# Altium PCB PCB_Luciferin_Module_V2.0_ETH_final.pcbdoc
Units mm, origin at the board's own origin, x right, y up, seen from the top; angles counter-clockwise.
Board outline 86.23 x 69.09 mm, 2 copper layers (Top Layer, Bottom Layer); 27 components, 44 nets, 70 pads, 42 vias.
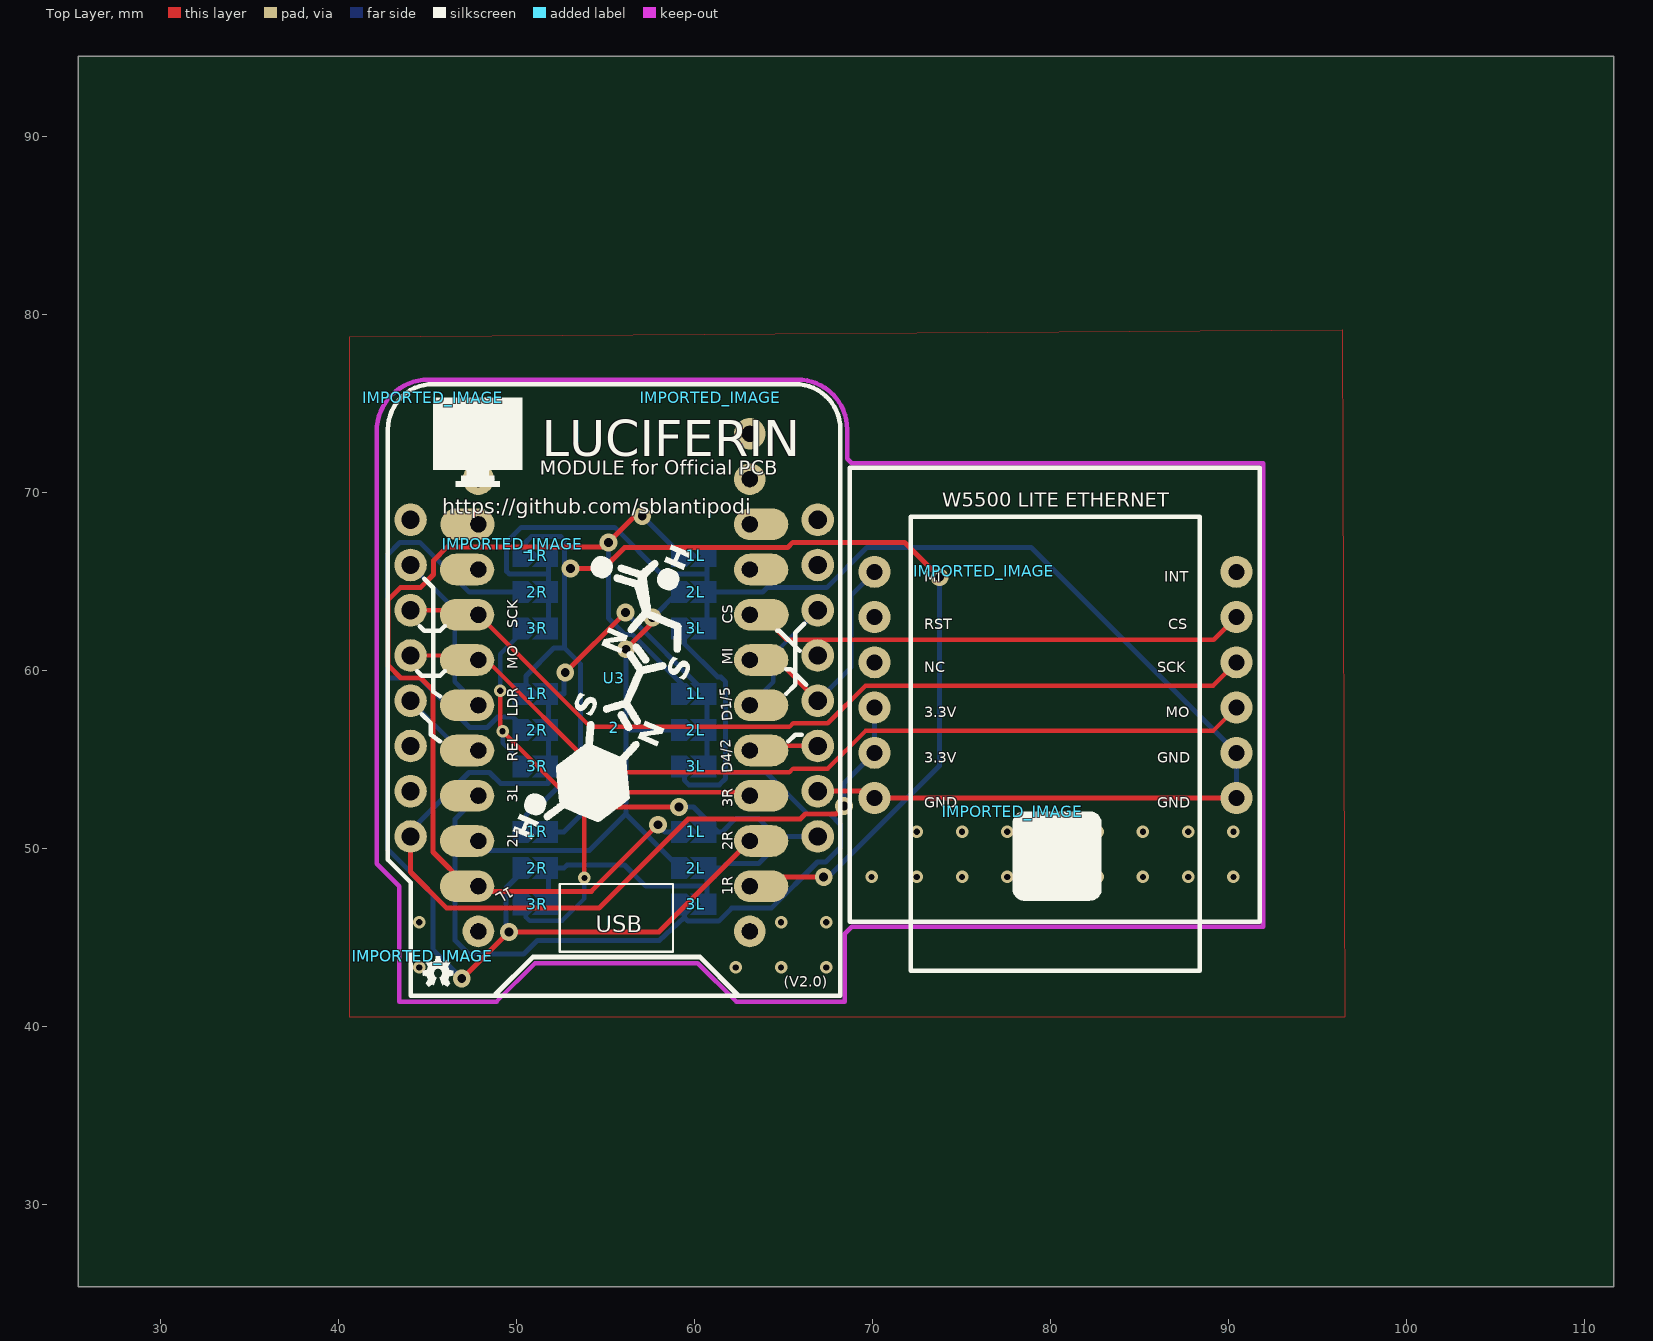
[diagram p0: Top Layer view]
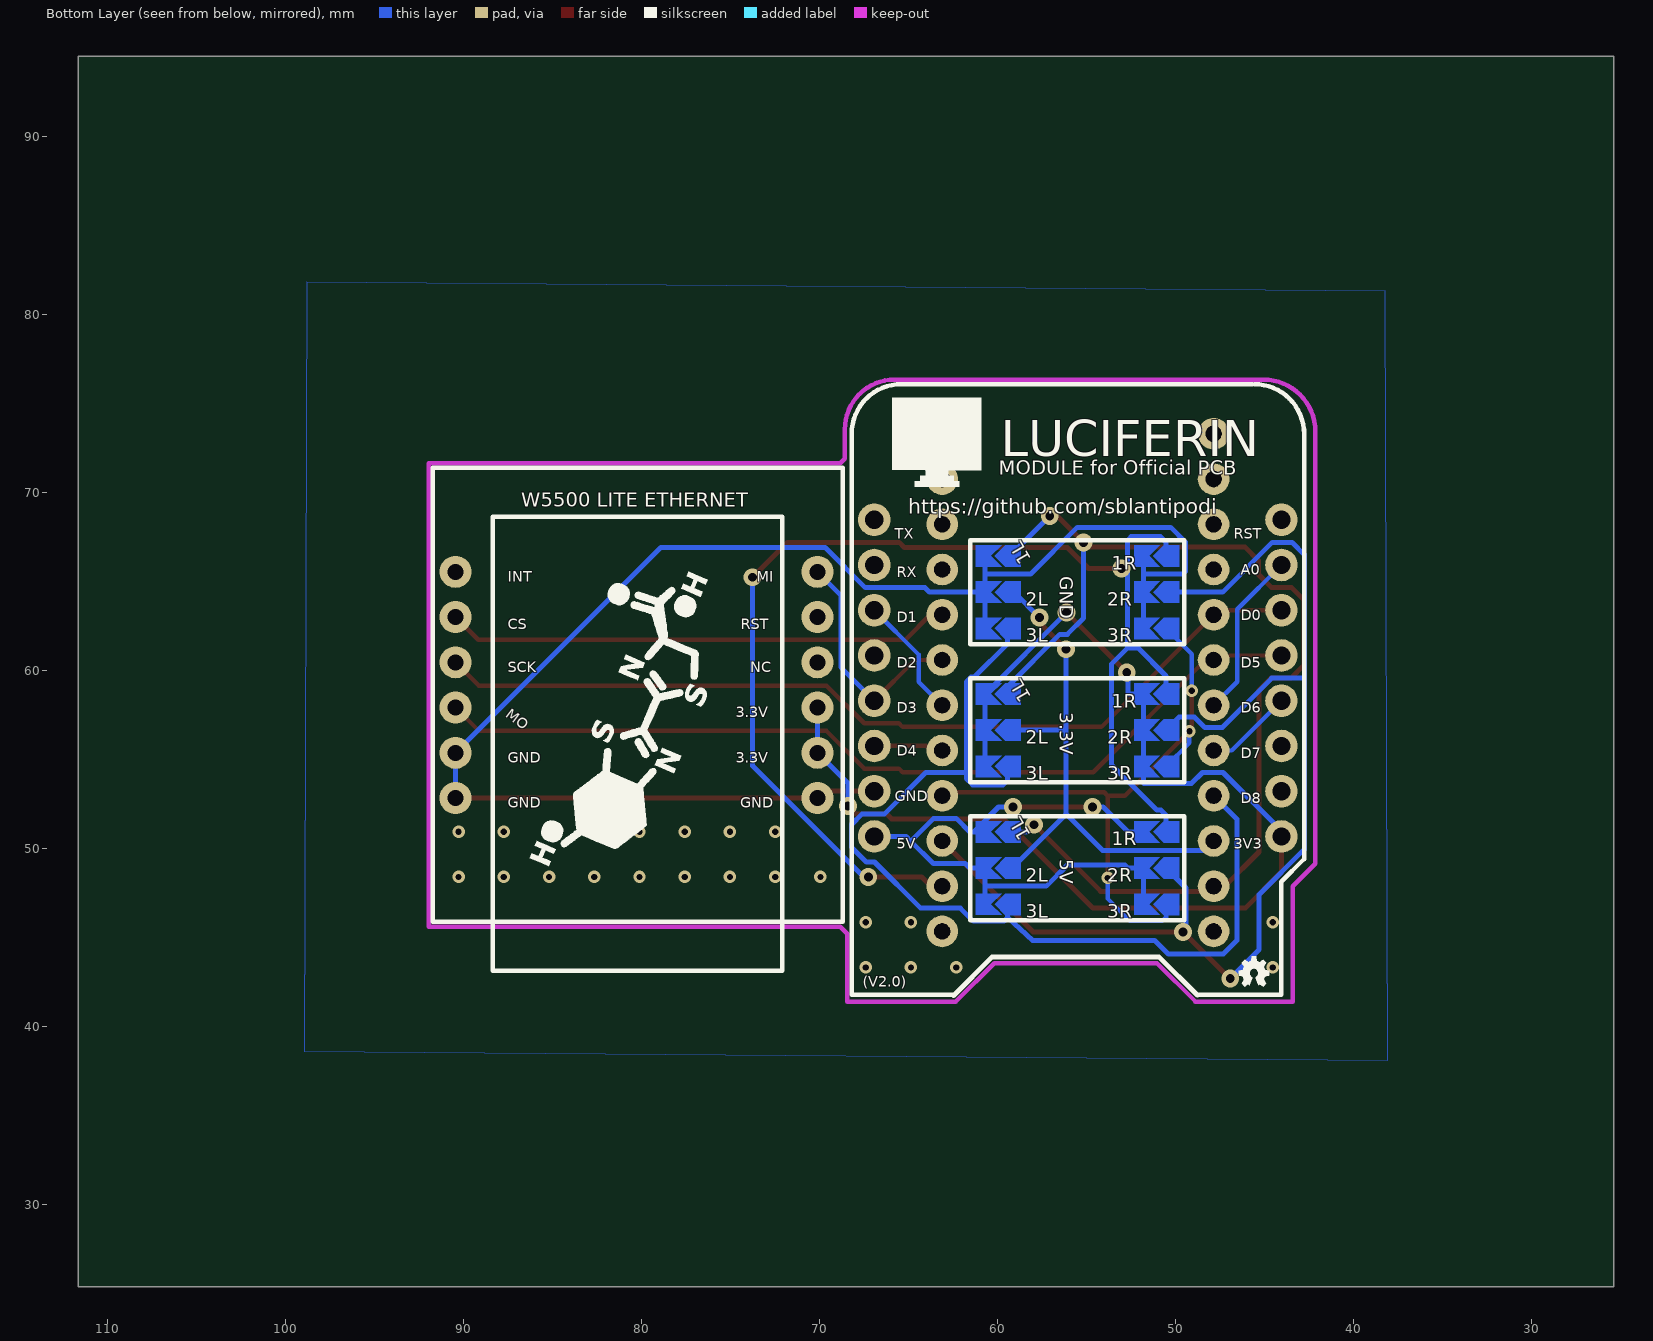
[diagram p1: Bottom Layer view, seen from below]

## Layer stack, top to bottom
Top Layer: signal copper (thickness not stored)
Dielectric: dielectric 0.32, FR-4, Dk 4.8
Bottom Layer: signal copper (thickness not stored)

## Board outline
111.633,25.4 25.4,25.4 25.4,94.488 111.633,94.488

## Components (designator, comment, footprint, x,y, rotation, side; value= is the part's Value field where it differs from the comment)
1L "Solder_joint" SB_SOLDER_JOINT 60.071,58.674 r0 top
1L "Solder_joint" SB_SOLDER_JOINT 60.071,50.927 r0 top
1L "Solder_joint" SB_SOLDER_JOINT 60.071,66.421 r0 top
1R "Solder_joint" SB_SOLDER_JOINT 51.181,58.674 r0 top
1R "Solder_joint" SB_SOLDER_JOINT 51.181,50.927 r0 top
1R "Solder_joint" SB_SOLDER_JOINT 51.181,66.421 r0 top
2 "SBLANT_TINYPICO_V3" TINYPICOV3 55.499,58.674 r90 top
2L "Solder_joint" SB_SOLDER_JOINT 60.071,56.642 r0 top
2L "Solder_joint" SB_SOLDER_JOINT 60.071,48.895 r0 top
2L "Solder_joint" SB_SOLDER_JOINT 60.071,64.389 r0 top
2R "Solder_joint" SB_SOLDER_JOINT 51.181,56.642 r0 top
2R "Solder_joint" SB_SOLDER_JOINT 51.181,48.895 r0 top
2R "Solder_joint" SB_SOLDER_JOINT 51.181,64.389 r0 top
3L "Solder_joint" SB_SOLDER_JOINT 60.071,54.61 r0 top
3L "Solder_joint" SB_SOLDER_JOINT 60.071,46.863 r0 top
3L "Solder_joint" SB_SOLDER_JOINT 60.071,62.357 r0 top
3R "Solder_joint" SB_SOLDER_JOINT 51.181,54.61 r0 top
3R "Solder_joint" SB_SOLDER_JOINT 51.181,46.863 r0 top
3R "Solder_joint" SB_SOLDER_JOINT 51.181,62.357 r0 top
IMPORTED_IMAGE "IMPORTED_IMAGE" IMPORTED_IMAGE 60.913,75.31 r0 top
IMPORTED_IMAGE "IMPORTED_IMAGE" IMPORTED_IMAGE 44.76,43.943 r0 top
IMPORTED_IMAGE "IMPORTED_IMAGE" IMPORTED_IMAGE 76.279,65.55 r0 top
IMPORTED_IMAGE "IMPORTED_IMAGE" IMPORTED_IMAGE 44.761,43.943 r0 top
IMPORTED_IMAGE "IMPORTED_IMAGE" IMPORTED_IMAGE 77.866,52.071 r0 top
IMPORTED_IMAGE "IMPORTED_IMAGE" IMPORTED_IMAGE 49.797,67.066 r0 top
IMPORTED_IMAGE "IMPORTED_IMAGE" IMPORTED_IMAGE 45.339,75.311 r0 top
U3 "LOLIN D1 MINI" WEMOS_D1_MINI_V2.3.0 55.499,59.563 r0 top

## Footprints (in the part's own frame and the unit in brackets; to place one, negate y for a bottom-side part, rotate by r counter-clockwise, add the part's x,y. Pads: shape width x height; smd on the part's side, far side on the other; paste and mask are expansions set on the pad)
IMPORTED_IMAGE [mm]
SB_SOLDER_JOINT [mm]
  Bottom Layer region: -0.506,-0.604 -0.51,-0.605 -1.36,-0.605 -1.364,-0.604 -1.365,-0.6 -1.365,0.6 -1.364,0.604 -1.36,0.605 -0.51,0.605 -0.506,0.604 0.094,0.004 0.095,0 0.094,-0.004
  Bottom Layer region: 1.156,-0.6 1.156,0.6 1.156,0.6 -0.286,0.6 -0.286,0.6 0.314,0 0.314,0 -0.286,-0.6 -0.286,-0.6
TINYPICOV3 [mil]
  round 70 hole 35.44 slot 35.45 at 0 deg paste+0 mask+2: 3V3(-225,300) 4(-125,300) 5(-225,-300) 5V(-325,300) 14(-25,300) 15(75,300) 18(-325,-300) 19(-425,-300) 21(-25,-300) 22(-125,-300) 23(-525,-300) 25(375,300) 26(275,300) 27(175,300) 32(75,-300) 33(175,-300) BAT(-525,300) GND1(-425,300) GND2(375,-300) RST(275,-300)
  oval 70x120 smd paste+0 mask+2: 3V3(-225,325) 4(-125,325) 5(-225,-325) 5V(-325,325) 14(-25,325) 15(75,325) 18(-325,-325) 19(-425,-325) 21(-25,-325) 22(-125,-325) 25(375,324) 26(275,325) 27(175,325) 32(75,-325) 33(175,-326) GND1(-425,325) GND2(375,-325) RST(275,-325)
  silkscreen extent -570,-130 -420,120
WEMOS_D1_MINI_V2.3.0 [mil]
  round 72 hole 40 paste+0 mask+4: 3V3(-450,-350) 5V(450,-350) A0(-450,250) D0(-450,150) D1(450,150) D2(450,50) D3(450,-50) D4(450,-150) D5(-450,50) D6(-450,-50) D7(-450,-150) D8(-450,-250) GND(450,-250) RST(-450,350) RX(450,250) TX(450,350)
  silkscreen extent -500,-702 500,650

## Free pads (board coordinates)
  round 1.8 hole 0.9 paste+0 mask+0.051: 1(90.439,52.83) 2(90.439,55.37) 3(90.439,57.91) 4(90.439,60.45) 5(90.439,62.99) 6(90.439,65.53) 7(70.119,65.53) 8(70.119,62.99) 9(70.119,60.45) 10(70.119,57.91) 11(70.119,55.37) 12(70.119,52.83)
  round 1.778 hole 0.9 slot 0.9 at 90 deg paste+0 mask+0.051: 25(47.879,73.279) 26(47.879,70.739) GND2(63.119,73.279) RST(63.119,70.739)

## Via types
v1: diameter 0.7, hole 0.35, Top Layer to Bottom Layer, tented both sides, 27 vias
v2: diameter 1, hole 0.5, Top Layer to Bottom Layer, tented both sides, 15 vias

## Nets (pads, with @x,y where several pads share a name; then routed paths per layer and width w, separated by ;. In a path a pad name is that pad's centre, name@x,y a point inside that pad or via, vN(x,y) a via of type N, cw(c..) or ccw(c..) an arc to the next point about the centre after c; other vN are vias at no path point)
1_15: 2.15 pad.3 U3.D5 | length 50.6
  Top Layer w0.25: U3.D5 46.99,60.833 47.244,60.579 47.879,60.579 48.337,60.579 54.633,54.283 65.343,54.283 65.542,54.483 67.497,54.483 69.611,56.597 89.126,56.597 pad.3
1_23: 2.23
1_26: 2.26 | length 0.6
  Top Layer w0.25: 2.26@47.244,65.659 2.26@47.879,65.659
1_27: 2.27 pad.4 U3.D0 | length 50.6
  Top Layer w0.25: U3.D0 46.99,63.373 47.244,63.119 47.879,63.119 54.175,56.823 65.343,56.823 65.542,57.023 67.497,57.023 69.611,59.137 89.126,59.137 pad.4
1_32: 2.32 pad.7 U3.D3 | length 13.3
  Top Layer w0.25: 2.32@63.119,60.579 63.754,60.579 64.643,60.579 U3.D3
  Bottom Layer w0.25: U3.D3 68.806,60.17 68.806,64.217 pad.7
1_33: 2.33 pad.5 U3.D2 | length 29.3
  Top Layer w0.25: 2.33@63.119,63.119 63.779,63.119 65.178,61.72 U3.D2@66.929,61.72 ; U3.D2 U3.D2@66.929,61.72 ; pad.5 89.169,61.72 U3.D2@66.929,61.72
1_BAT: 2.BAT
1_RST: 2.RST | length 0.6
  Top Layer w0.25: 2.RST@63.119,65.659 2.RST@63.754,65.659
NC1: pad.25
NC2: pad.GND2
NC3: pad.26
NC4: pad.RST
NC5: 2.25 | length 0.6
  Top Layer w0.25: 2.25@47.269,68.199 2.25@47.879,68.199
NC6: 2.GND2 | length 0.6
  Top Layer w0.25: 2.GND2@63.119,68.199 2.GND2@63.754,68.199
S$5398: 
S$5402: 
S$5406: 
S$5410: 
S$5488: 
S$6280: 
S$6292: 
S$12763: 
S$13149: 
S$13153: 
S$20682: 
S$86624: 
SJ_5V_1_LEFT_1: 2.GND1 | length 63.1
  Top Layer w0.28: v2(57.078,68.665) 56.66,68.665 v2(55.18,67.185) 54.911,66.915 46.106,66.915 45.352,66.161 45.352,65.38 44.615,64.643 43.489,64.643 42.813,63.967 42.813,60.28 43.53,59.563 44.652,59.563 45.325,58.89 45.325,49.798 47.244,47.879 47.879,47.879 48.164,47.594 54.217,47.594 v2(57.952,51.329)
  Bottom Layer w0.28: v2(55.18,67.185) 55.18,62.93 56.087,62.023 56.506,62.023 59.436,59.094 59.436,58.674 ; v2(57.078,68.665) 59.321,66.421 59.436,66.421 ; v2(57.952,51.329) 58.354,50.927 59.436,50.927
SJ_5V_2_LEFT_1: 2.5V | length 31.8
  Top Layer w0.28: 2.5V@47.244,50.419 2.5V@47.879,50.419 ; v2(56.158,61.182) 57.657,62.681 v2(57.657,62.968)
  Bottom Layer w0.28: 2.5V@47.879,50.419 48.416,49.882 54.106,49.882 56.158,51.934 ; v2(56.158,61.182) 56.158,56.642 ; v2(57.657,62.968) 59.078,64.389 59.436,64.389 ; 59.436,48.895 59.196,48.895 56.158,51.934 ; 59.436,56.642 56.158,56.642 ; 56.158,51.934 56.158,56.642
SJ_5V_3_LEFT_1: 2.3V3 | length 56.4
  Top Layer w0.28: 2.3V3@47.244,52.959 2.3V3@47.879,52.959
  Bottom Layer w0.28: 2.3V3@47.879,52.959 46.571,51.648 46.571,44.831 47.333,44.069 50.419,44.069 51.181,44.831 58.039,44.831 59.436,46.129 ; 59.436,46.863 59.436,46.129 ; 59.436,54.61 59.436,53.831 59.696,53.571 61.406,53.571 61.758,53.923 61.758,54.268 ; 59.436,62.357 59.436,61.497 61.312,59.621 61.487,59.621 61.758,59.351 61.758,54.268 ; 59.436,46.129 59.648,45.917 61.364,45.917 62.096,46.649 64.328,46.649 66.916,49.236 67.371,49.236 68.208,50.073 68.208,51.342 67.606,51.944 66.348,51.944 64.023,54.268 61.758,54.268
SJ_GND_1_RIGHT_1: 2.19 | length 71.6
  Top Layer w0.28: v2(53.054,65.716) 54.902,65.716 56.075,66.889 65.234,66.89 65.527,67.183 71.804,67.183 v2(73.762,65.226) ; 2.19@63.119,47.879 63.754,47.879 64.27,48.395 v2(67.264,48.395)
  Bottom Layer w0.28: 50.546,50.927 50.546,51.861 50.835,52.15 51.059,52.15 53.596,54.687 53.596,60.364 52.701,61.259 ; 50.546,58.674 50.546,59.683 52.122,61.259 52.701,61.259 ; 50.546,66.421 50.546,67.201 50.846,67.502 52.503,67.502 52.701,67.303 v2@52.701,65.716 ; v2(53.054,65.716) v2@52.701,65.716 ; v2(67.264,48.395) 67.523,48.395 73.762,54.634 v2(73.762,65.226) ; 52.701,61.259 v2@52.701,65.716
SJ_GND_2_RIGHT_1: 2.18 | length 68.3
  Top Layer w0.28: v2(46.939,42.698) 46.979,42.698 v2(49.595,45.314) 58.014,45.314 63.119,50.419 2.18@63.754,50.419
  Bottom Layer w0.28: v2(46.939,42.698) 45.325,44.312 45.325,47.408 42.781,49.952 42.781,59.563 ; v2(49.595,45.314) 49.426,45.482 49.426,47.775 50.546,48.895 ; 50.546,56.642 49.809,57.379 48.959,57.379 48.371,56.79 47.387,56.79 44.615,59.563 42.781,59.563 ; 50.546,64.389 47.37,64.389 44.576,67.183 43.474,67.183 42.781,66.49 42.781,59.563
SJ_GND_3_RIGHT_1: 2.5 | length 35.5
  Top Layer w0.25: v1(49.1,58.859) 49.1,56.714 v1(49.235,56.58) 52.856,52.959 53.829,52.959 ; v1(53.829,48.342) 53.829,52.959 ; 2.5@63.754,52.959 63.119,52.959 62.927,53.151 54.021,53.151 53.829,52.959
  Bottom Layer w0.25: v1(49.1,58.859) 49.1,60.911 50.546,62.357 ; v1(49.235,56.58) 49.235,55.921 50.546,54.61 ; 50.546,46.863 50.546,46.14 50.75,45.936 52.576,45.936 53.829,47.189 v1(53.829,48.342)
U1_3V3: pad.10 pad.11 U3.3V3 | length 67.9
  Top Layer w0.28: U3.3V3 44.069,48.672 46.093,46.648 54.651,46.648 59.653,51.651 65.953,51.651 66.246,51.943 67.967,51.943 v2(68.4,52.376) ; v2(52.755,59.875) 56.119,63.239 v2(56.141,63.239)
  Bottom Layer w0.28: U3.3V3 44.069,50.983 47.353,54.268 48.505,54.268 49.124,53.648 51.794,53.648 51.816,53.67 51.816,54.14 51.816,54.61 51.816,56.642 51.816,58.674 52.677,58.674 52.677,59.797 v2(52.755,59.875) ; v2(56.141,63.239) 60.706,58.674 60.706,56.642 60.706,54.61 ; v2(68.4,52.376) 68.4,53.651 pad.11 pad.10
U1_5V: U3.5V | length 36.2
  Top Layer w0.28: v2(54.677,52.324) v2(59.137,52.324)
  Bottom Layer w0.28: 51.816,46.863 51.816,48.895 52.677,48.895 52.856,49.074 56.084,49.074 57.279,47.879 60.706,47.879 ; 51.816,50.927 52.677,50.927 54.075,52.324 v2(54.677,52.324) ; v2(59.137,52.324) 59.955,52.324 61.352,50.927 ; 60.706,46.863 60.706,47.879 ; 60.706,50.927 61.352,50.927 ; U3.5V 65.137,50.673 64.873,50.409 ; 60.706,47.879 60.706,48.895 61.567,48.895 61.823,49.151 63.615,49.151 64.873,50.409 ; 61.352,50.927 61.567,50.927 62.329,51.689 63.592,51.689 64.873,50.409
U1_A0: 2.14 U3.A0 | length 10.1
  Top Layer w0.25: 2.14@47.244,58.039 2.14@47.879,58.039
  Bottom Layer w0.25: U3.A0 46.555,63.427 46.555,59.363 2.14@47.879,58.039
U1_D1: 2.21 U3.D1 | length 7.5
  Top Layer w0.25: 2.21@63.119,58.039 2.21@63.754,58.039
  Bottom Layer w0.25: 2.21@63.119,58.039 64.443,59.363 64.443,60.887 U3.D1
U1_D4: 2.22 U3.D4 | length 3.9
  Top Layer w0.25: 2.22@63.119,55.499 63.754,55.499 64.008,55.753 U3.D4
U1_D6: 2.4 U3.D6 | length 5.6
  Top Layer w0.25: 2.4@47.244,55.499 2.4@47.879,55.499
  Bottom Layer w0.25: U3.D6 46.863,55.499 2.4@47.879,55.499
U1_D7: U3.D7
U1_D8: U3.D8
U1_GND: pad.1 pad.2 pad.12 U3.GND | length 86.6
  Top Layer w0.28: U3.GND 66.934,53.218 69.731,53.218 pad.12 pad.1
  Bottom Layer w0.28: 51.816,62.357 51.816,64.389 51.816,65.405 ; 51.816,66.421 51.816,65.405 ; 60.706,62.357 60.706,64.389 ; 60.706,66.421 60.706,65.405 ; pad.1 pad.2 78.914,66.895 69.687,66.895 67.436,64.643 64.083,64.643 63.829,64.389 60.706,64.389 ; 51.816,65.405 49.613,65.405 49.463,65.555 49.463,67.205 50.284,68.026 55.529,68.026 58.15,65.405 60.706,65.405 ; 60.706,64.389 60.706,65.405
  other v1: 44.551,43.317 62.331,43.317 64.871,43.317 67.411,43.317 44.551,45.857 64.871,45.857 67.411,45.857 69.951,48.397 72.491,48.397 75.031,48.397 77.571,48.397 80.111,48.397 82.651,48.397 85.191,48.397 87.731,48.397 90.271,48.397 72.491,50.937 75.031,50.937 77.571,50.937 80.111,50.937 82.651,50.937 85.191,50.937 87.731,50.937 90.271,50.937
U1_RST: U3.RST
U1_RX: U3.RX
U1_TX: U3.TX

## Polygon pours and split planes (outlines as drawn)
U1_GND on Bottom Layer (solid): 38.227,81.28 98.806,81.788 98.933,38.608 38.1,38.1
U1_GND on Top Layer (solid): 40.64,78.74 96.393,79.121 96.52,40.513 70.993,40.513 40.64,40.513

## Keep-outs
Keep-Out Layer:
  lines w0.254 net S$12763: 42.164,73.406 cw(c45.085,73.406) 45.338,76.316 ; 65.786,76.327 cw(c65.786,73.533) 68.58,73.533

## Silkscreen, mask and mechanical layers (free items; w line width, h text height)
Top Overlay:
  lines w0.254: 68.739,45.88 91.739,45.88 91.739,71.38 68.739,71.38 68.739,45.88 ; 72.139,43.13 88.389,43.13 88.389,68.63 72.139,68.63 72.139,43.13
  lines w0.254 net S$13149: 65.151,58.674 65.659,59.182 65.659,62.103 66.167,62.611
  lines w0.254 net S$13153: 65.278,56.007 65.659,56.388 66.04,56.388
  lines w0.254 net S$5398: 44.577,62.484 44.831,62.23 45.72,62.23 45.974,62.484
  lines w0.254 net S$5402: 44.45,59.944 44.704,59.69 45.72,59.69 45.974,59.944
  lines w0.254 net S$5406: 64.643,62.23 64.77,62.23 65.913,61.087
  lines w0.254 net S$5410: 65.151,60.071 65.405,60.071 66.294,59.182
  lines w0.254 net U1_A0: 44.831,65.151 45.339,64.643 45.339,58.801 45.72,58.547
  lines w0.254 net U1_D6: 44.704,57.531 45.212,57.023 45.212,56.388 45.72,56.007
  lines w0.28 net S$86624: 48.838,41.737 48.838,41.806 50.928,43.896 60.326,43.896 62.478,41.737
  text "LUCIFERIN" at 51.435,72.01 h2.03
  text "MODULE for Official PCB" at 51.308,70.975 h0.8
  text "W5500 LITE ETHERNET" at 73.914,69.196 h0.8
  text "https://github.com/sblantipodi" at 45.847,68.791 h0.85
  text "MI" at 72.898,64.978 h0.6
  text "INT" at 86.388,64.978 h0.6
  text "CS" at 62.149,62.611 h0.6 r90
  text "SCK" at 50.084,62.357 h0.6 r90
  text "RST" at 72.898,62.311 h0.6
  text "CS" at 86.614,62.311 h0.6
  text "MI" at 62.149,60.325 h0.6 r90
  text "MO" at 50.084,60.071 h0.6 r90
  text "NC" at 72.898,59.898 h0.6
  text "SCK" at 85.979,59.898 h0.6
  text "LDR" at 50.084,57.404 h0.6 r90
  text "3.3V" at 72.898,57.358 h0.6
  text "MO" at 86.459,57.358 h0.6
  text "D1/5" at 62.148,57.176 h0.6 r95
  text "REL" at 50.084,54.864 h0.6 r90
  text "3.3V" at 72.898,54.818 h0.6
  text "GND" at 85.979,54.818 h0.6
  text "D4/2" at 62.148,54.25 h0.6 r94
  text "3L" at 50.084,52.578 h0.6 r90
  text "3R" at 62.149,52.324 h0.6 r90
  text "GND" at 72.898,52.278 h0.6
  text "GND" at 85.979,52.278 h0.6
  text "2L" at 50.084,50.038 h0.6 r90
  text "2R" at 62.149,49.911 h0.6 r90
  text "1L" at 49.634,47.885 h0.6 r210
  text "1R" at 62.149,47.371 h0.6 r90
  text "(V2.0)" at 65.024,42.245 h0.6
Bottom Overlay:
  lines w0.254: 49.53,45.966 61.53,45.966 61.53,51.816 49.53,51.816 49.53,45.966 ; 49.53,53.713 61.53,53.713 61.53,59.563 49.53,59.563 49.53,53.713 ; 49.53,61.46 61.53,61.46 61.53,67.31 49.53,67.31 49.53,61.46 ; 68.707,45.874 91.707,45.874 91.707,71.374 68.707,71.374 68.707,45.874 ; 72.107,43.124 88.357,43.124 88.357,68.624 72.107,68.624 72.107,43.124
  lines w0.254 net S$12763: 42.799,73.279 cw(c45.593,73.279) 45.593,76.073 ; 42.799,73.533 42.799,49.403 44.069,48.133 44.069,41.783 48.768,41.783 ; 45.72,76.073 64.897,76.073 ; 62.484,41.783 68.199,41.783 68.199,73.406 ; 64.389,76.073 65.405,76.073 cw(c65.405,73.279) 68.199,73.279
  lines w0.28 net S$86624: 48.768,41.783 48.838,41.806 50.928,43.896 60.326,43.896 62.478,41.737
  text "LUCIFERIN" at 59.817,72.009 h2.03
  text "MODULE for Official PCB" at 59.944,70.974 h0.8
  text "W5500 LITE ETHERNET" at 86.741,69.196 h0.8
  text "https://github.com/sblantipodi" at 65.024,68.79 h0.85
  text "GND" at 56.515,65.278 h0.76 r90
  text "MI" at 73.533,64.978 h0.6
  text "INT" at 87.503,64.978 h0.6
  text "RST" at 74.422,62.311 h0.6
  text "CS" at 87.503,62.311 h0.6
  text "NC" at 73.886,59.898 h0.6
  text "SCK" at 87.503,59.898 h0.6
  text "3.3V" at 56.515,57.658 h0.76 r90
  text "MO" at 87.684,57.418 h0.6 r37
  text "3.3V" at 74.712,57.358 h0.6
  text "3.3V" at 74.712,54.818 h0.6
  text "GND" at 87.503,54.818 h0.6
  text "GND" at 74.447,52.278 h0.6
  text "GND" at 87.503,52.278 h0.6
  text "5V" at 56.515,49.403 h0.76 r90
  text "(V2.0)" at 67.564,42.245 h0.6
Document:
  lines w0.003: 68.516,59.944 68.517,59.944

## Text inside footprints (layer, text, board x,y; h text height)
2: Top Overlay "USB" at 54.47,45.301 h0.91
U3: Bottom Overlay "D8" at 46.355,52.532 h0.6; Bottom Overlay "D7" at 46.355,55.072 h0.6; Bottom Overlay "D6" at 46.355,57.612 h0.6; Bottom Overlay "D5" at 46.355,60.152 h0.6; Bottom Overlay "D0" at 46.355,62.819 h0.6; Bottom Overlay "A0" at 46.355,65.359 h0.6; Bottom Overlay "RST" at 46.736,67.391 h0.6; Bottom Overlay "3V3" at 46.736,49.992 h0.6; Bottom Overlay "5V" at 65.659,49.992 h0.6; Bottom Overlay "GND" at 65.786,52.659 h0.6; Bottom Overlay "D4" at 65.659,55.199 h0.6; Bottom Overlay "D3" at 65.659,57.612 h0.6; Bottom Overlay "D2" at 65.659,60.152 h0.6; Bottom Overlay "D1" at 65.659,62.692 h0.6; Bottom Overlay "RX" at 65.659,65.232 h0.6; Bottom Overlay "TX" at 65.786,67.391 h0.6